# Altium PCB DCBus_PCB_v1.0.PcbDoc
Units mm, origin at the board's own origin, x right, y up, seen from the top; angles counter-clockwise.
Board outline 160 x 80 mm, 2 copper layers (Top Layer, Bottom Layer), stack 1.69 mm thick; 64 components, 32 nets, 154 pads, 48 vias.
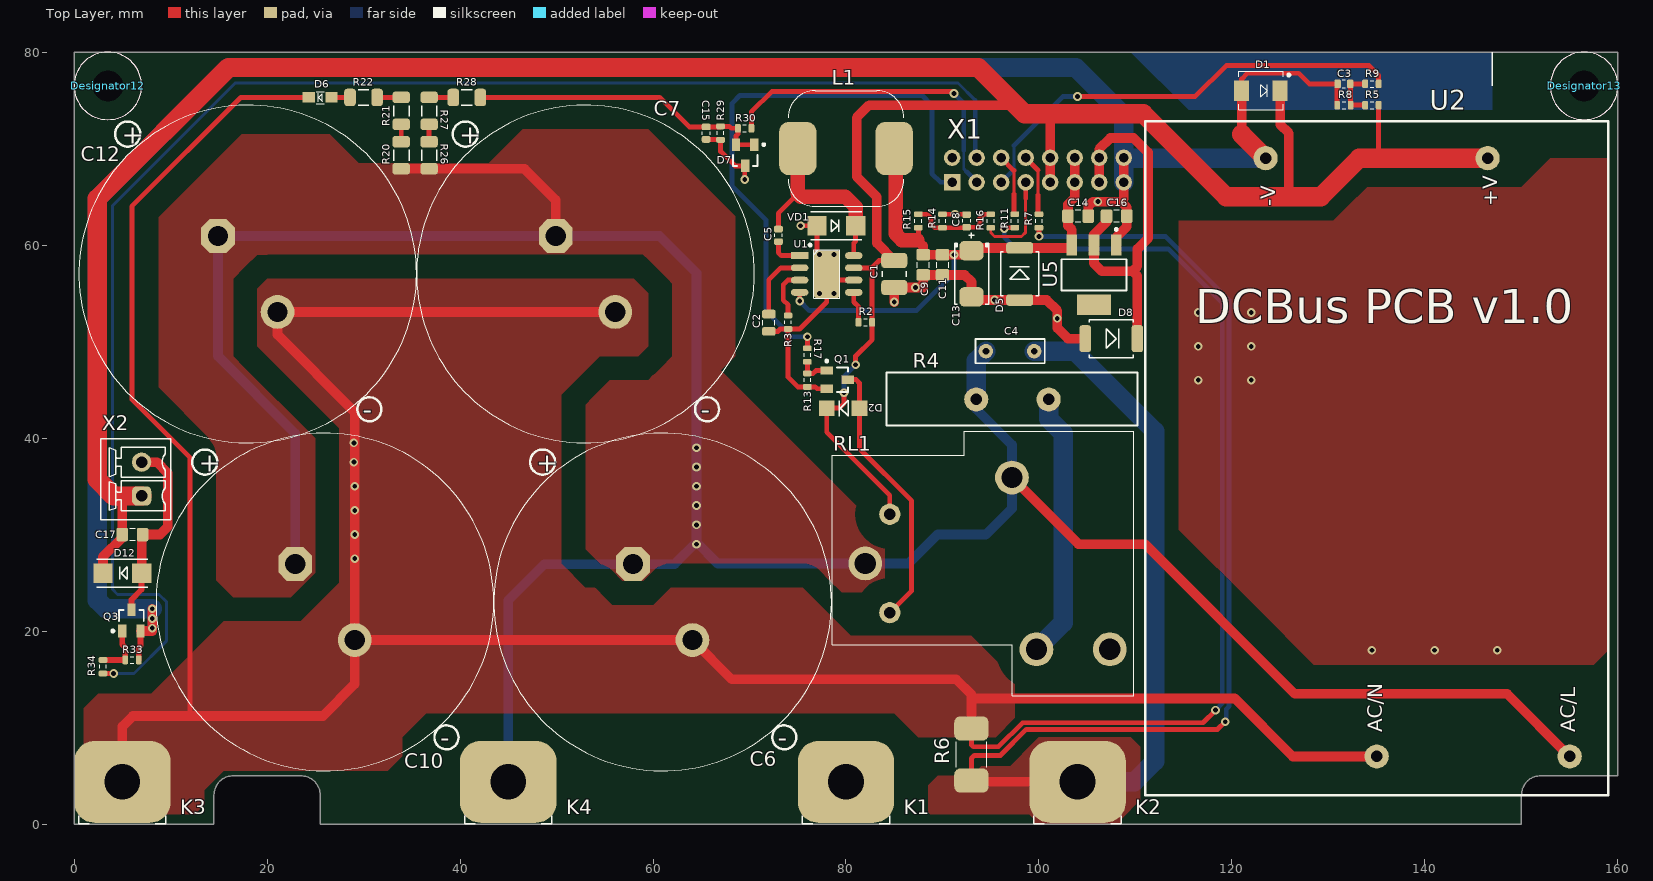
[diagram p0: Top Layer view]
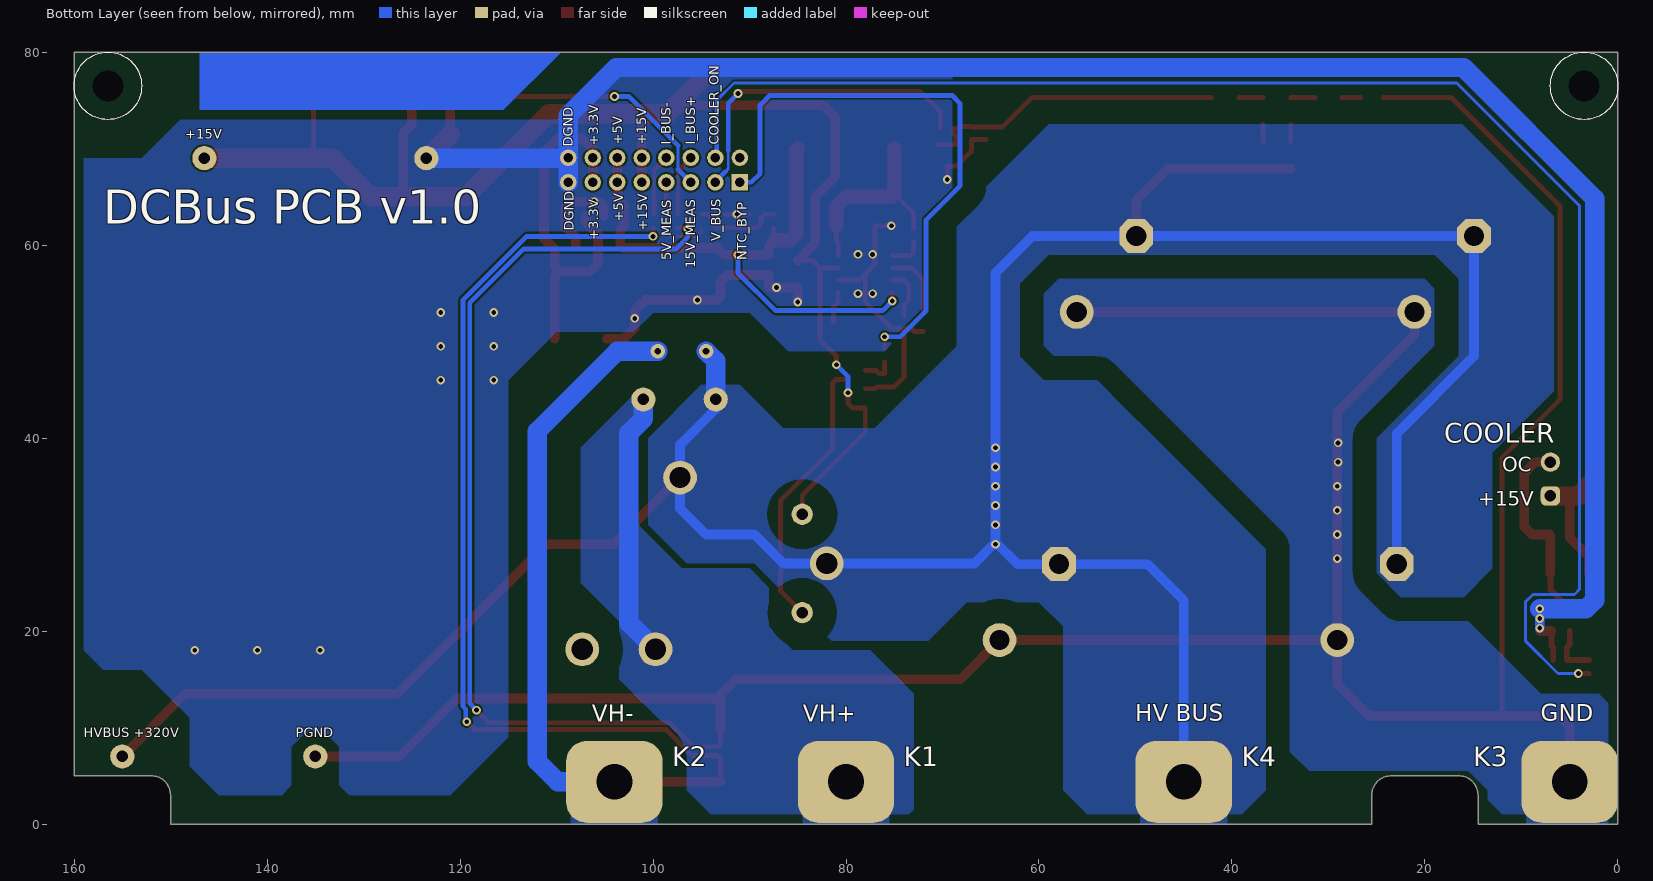
[diagram p1: Bottom Layer view, seen from below]
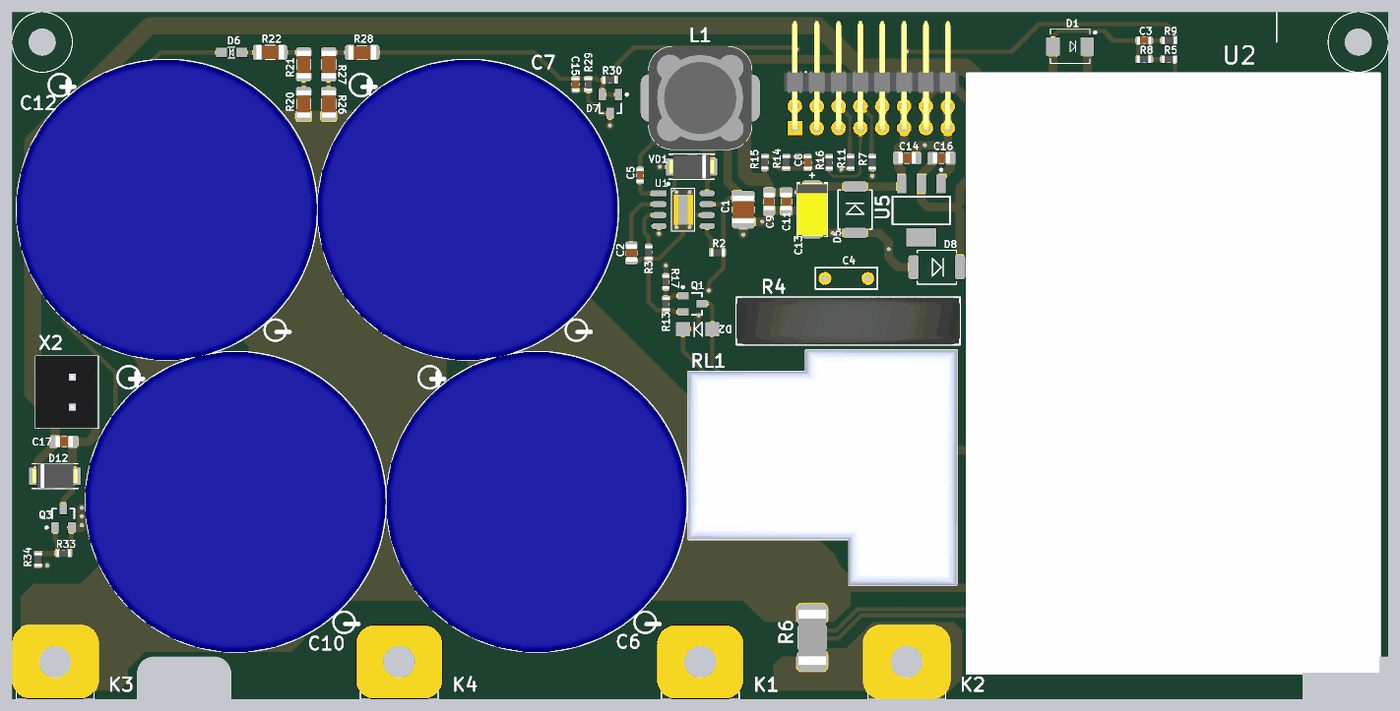
[diagram p2: 3D render of the assembled board from above, using the file's embedded part models]

## Layer stack, top to bottom
Top Solder: solder mask 0.0102, Solder Resist, Dk 3.5
Top Layer: signal copper 0.07
Dielectric1: core 1.55, FR-4, Dk 4.8
Bottom Layer: signal copper 0.07
Bottom Solder: solder mask 0.0102, Solder Resist, Dk 3.5

## Board outline
14.5,0 14.5,3 cw(c16.5,3) 16.5,5 23.5,5 cw(c23.5,3) 25.5,3 25.5,0 150,0 150,3 cw(c152,3) 152,5 160,5 160,80 0,80 0,0

## Design rules (kind name [scope] priority, off if disabled: settings)
Clearance MV [InNetClass('MV')] p1: gap=1 ignorepadtopadclearanceinfootprint=FALSE except(0: Arc-Hole Track-Hole SMDPad-Hole THPad-Hole Via-Hole Fill-Hole Poly-Hole Region-Hole Text-Hole)
Clearance HV_W [InNetClass('HV_W') vs InNetClass('HV_W')] p2: gap=0.2 ignorepadtopadclearanceinfootprint=FALSE except(0: Arc-Hole Track-Hole SMDPad-Hole THPad-Hole Via-Hole Fill-Hole Poly-Hole Region-Hole Text-Hole)
Clearance HV_V [InNetClass('HV_V') vs InNetClass('HV_V')] p3: gap=0.2 ignorepadtopadclearanceinfootprint=FALSE except(0: Arc-Hole Track-Hole SMDPad-Hole THPad-Hole Via-Hole Fill-Hole Poly-Hole Region-Hole Text-Hole)
Clearance HV_U [InNetClass('HV_U') vs InNetClass('HV_U')] p4: gap=0.2 ignorepadtopadclearanceinfootprint=FALSE except(0: Arc-Hole Track-Hole SMDPad-Hole THPad-Hole Via-Hole Fill-Hole Poly-Hole Region-Hole Text-Hole)
Clearance HV_B [InNetClass('HV_B') vs InNetClass('HV_B')] p5: gap=0.2 ignorepadtopadclearanceinfootprint=FALSE except(0: Arc-Hole Track-Hole SMDPad-Hole THPad-Hole Via-Hole Fill-Hole Poly-Hole Region-Hole Text-Hole)
Clearance HV_L [InNetClass('HV_L') vs InNetClass('HV_L')] p6: gap=0.2 ignorepadtopadclearanceinfootprint=FALSE except(0: Arc-Hole Track-Hole SMDPad-Hole THPad-Hole Via-Hole Fill-Hole Poly-Hole Region-Hole Text-Hole)
Clearance HV_N [InNetClass('HV_N') vs InNetClass('HV_N')] p7: gap=0.2 ignorepadtopadclearanceinfootprint=FALSE except(0: Arc-Hole Track-Hole SMDPad-Hole THPad-Hole Via-Hole Fill-Hole Poly-Hole Region-Hole Text-Hole)
Clearance OnMid_HV [OnMid vs InNetClass('HV_W') or InNetClass('HV_V') or InNetClass('HV_U') or InNetClass('HV_B') or InNetClass('HV_L') or InNetClass('HV_N')] p8: gap=1 ignorepadtopadclearanceinfootprint=FALSE except(0: Arc-Hole Track-Hole SMDPad-Hole THPad-Hole Via-Hole Fill-Hole Poly-Hole Region-Hole Text-Hole)
Clearance HV_OnMid [(InNetClass('HV_W') or InNetClass('HV_V') or InNetClass('HV_U') or InNetClass('HV_B') or InNetClass('HV_L') or InNetClass('HV_N')) and OnMid] p9: gap=1 ignorepadtopadclearanceinfootprint=FALSE except(0: Arc-Hole Track-Hole SMDPad-Hole THPad-Hole Via-Hole Fill-Hole Poly-Hole Region-Hole Text-Hole)
Clearance HV [(InNetClass('HV_W') or InNetClass('HV_V') or InNetClass('HV_U') or InNetClass('HV_B') or InNetClass('HV_L') or InNetClass('HV_N') )] p10: gap=2.5 ignorepadtopadclearanceinfootprint=FALSE except(0: Arc-Hole Track-Hole SMDPad-Hole THPad-Hole Via-Hole Fill-Hole Poly-Hole Region-Hole Text-Hole)
Clearance [All] p11: gap=0.2 ignorepadtopadclearanceinfootprint=FALSE except(0: Arc-Hole Track-Hole SMDPad-Hole THPad-Hole Via-Hole Fill-Hole Poly-Hole Region-Hole Text-Hole)
ComponentClearance [All] p1: gap=0 collisioncheckmode=3 verticalgap=0 showdistances=FALSE
Height [All] p1: minheight=0 maxheight=100 prefheight=12.7
HoleSize [All] p1: absolutevalues=TRUE maxlimit=8 minlimit=0.2 maxpercent=80.000 minpercent=20.000
HoleToHoleClearance [All] p1: gap=0.2 allowstackedmicrovias=TRUE
MinimumSolderMaskSliver [All] p1: minsoldermaskwidth=0
PolygonConnect [All] p1: connectstyle=Direct reliefconductorwidth=0.254 reliefentries=4 polygonreliefangle="90 Angle" airgapwidth=0.254
RoutingVias [All] p1: holewidth=0.5 width=0.9 viastyle="Through Hole" minholewidth=0.3 minwidth=0.6 maxholewidth=3 maxwidth=4
SilkToSilkClearance [All] p1: silktosilkclearance=0
SilkToSolderMaskClearance [IsPad] p1: minsilkscreentomaskgap=0 clearancetoexposedcopper=TRUE
SolderMaskExpansion [All] p1: expansion=0.102 istentingtop=FALSE
Width [All] p1: maxlimit=10 minlimit=0.2 preferedwidth=0.3
23 further rules are at their usual default settings.

## Classes and differential pairs
net class HV_B: HVBUS NetK1_1
net class MV: NetR20_2 NetR26_2

## Components (designator, comment, footprint, x,y, rotation, side; value= is the part's Value field where it differs from the comment)
C1 "GRM32DF51H106ZA01L" 3225[1210] 85,57 r270 top
C2 "GRM21BR71A105KA01L" 2012[0805] 72,52 r90 top
C3 "CL10B102KB8NNNC" 1608[0603] 131.6,76.7 r0 top
C4 "B32529C8102J" B32529C8102J 97,49 r0 top
C5 "CL10B103JB8NNNC" 1608[0603] 73,61 r270 top
C6 "ESMH451VNN471MA50T" ESMH451VNN471MA50T 61,23 r0 top locked
C7 "ESMH451VNN471MA50T" ESMH451VNN471MA50T 53,57 r0 top locked
C8 "CL10B102KB8NNNC" 1608[0603] 92.5,62.5 r270 top
C9 "LMK212F106ZG-T" 0805-1206 88,58 r90 top
C10 "ESMH451VNN471MA50T" ESMH451VNN471MA50T 26,23 r0 top locked
C11 "LMK212F106ZG-T" 0805-1206 90,58 r90 top
C12 "ESMH451VNN471MA50T" ESMH451VNN471MA50T 18,57 r0 top locked
C13 "TPSD227M010R0150" "Tant case C (6032-28)" 93,57 r270 top
C14 "LMK212F106ZG-T" 0805-1206 104,63 r180 top
C15 "CL10B102KB8NNNC" 1608[0603] 65.5,71.6 r270 top
C16 "LMK212F106ZG-T" 0805-1206 108,63 r180 top
C17 "LMK212F106ZG-T" 0805-1206 6,30 r180 top
D1 "SMBJ15A" "SMB ST" 123,76 r0 top
D2 "1N4148-0805" DIODE1206_LL4148 79.7,43.1 r90 top
D5 "SMAJ5.0A-LF" DO-214AA_SMBJ 98,57 r270 top
D6 "SML-211UTT86" "0805 LED" 25.5,75.3 r180 top
D7 "ESDA6V1L" SOT23 70.5,70.4 r180 top
D8 "SMAJ5.0A-LF" DO-214AA_SMBJ 107.5,50.3 r180 top
D12 "15MQ040NTRPBF" SMA 5,26 r180 top
Designator12 "Comment" HOLE_3MM 3.5,76.5 r0 top
Designator13 "Comment" HOLE_3MM 156.5,76.5 r0 top
K1 "Screw terminal KEYS7692 front" KEY7692_front 80,4.369 r0 top locked net-tie
K2 "Screw terminal KEYS7692 front" KEY7692_front 104,4.369 r0 top locked net-tie
K3 "Screw terminal KEYS7692 front" KEY7692_front 5,4.369 r0 top locked net-tie
K4 "Screw terminal KEYS7692 front" KEY7692_front 45,4.369 r0 top locked net-tie
L1 "DR127-101-R" DR127 80,70 r0 top
Q1 "BC817-40" SOT23 78,47 r270 top
Q3 "IRLML6344TRPBF" SOT23 5,20 r0 top
R2 "RC0603FR-07220KL" 0603 82,52 r0 top
R3 "RC0603FR-0747KL" 0603 74,52 r90 top
R4 "B57464S100M000" B57464 101,44 r180 top
R5 "RC0603FR-0733KL" 0603 134.5,74.5 r180 top
R6 "MCS3264R005FER" MCS3264 93,4.5 r90 top
R7 "ERJ-3EKF1000V" 0603 100,62.5 r270 top
R8 "RJ0603FRE074K7L" 0603 131.6,74.5 r180 top
R9 "ERJ-3EKF1000V" 0603 134.5,76.7 r0 top
R11 "ERJ-3EKF1000V" 0603 97.5,62.5 r270 top
R13 "ERJ-3EKF1002V" 0603 76,46 r90 top
R14 "RJ0603FRE074K7L" 0603 90,62.5 r90 top
R15 "RJ0603FRE074K7L" 0603 87.5,62.5 r90 top
R16 "ERJ-3EKF1000V" 0603 95,62.5 r270 top
R17 "RC0603FR-071KL" 0603 76,48.6 r270 top
R20 "ERJ-8ENF1003V" 3216[1206] 33.9,69.3 r90 top
R21 "ERJ-8ENF1003V" 3216[1206] 33.9,73.9 r90 top
R22 "ERJ-8ENF1003V" 3216[1206] 30,75.3 r180 top
R26 "ERJ-8ENF1003V" 3216[1206] 36.8,69.3 r90 top
R27 "ERJ-8ENF1003V" 3216[1206] 36.8,73.9 r90 top
R28 "ERJ-8ENF1003V" 3216[1206] 40.7,75.3 r0 top
R29 "RC0603FR-072K2L" 0603 67,71.6 r270 top
R30 "RC0603FR-07330RL" 0603 69.5,72.1 r180 top
R33 "RJ0603FRE074K7L" 0603 6,17 r180 top
R34 "ERJ-3EKF1000V" 0603 3,16.3 r270 top
RL1 "T9AS1D12-12" T90 82,27 r90 top
U1 "LM22672" "SOIC-8 EDP" 78,57 r0 top
U2 "NFM-15-15" NFM-15 155,7 r90 top locked
U5 "LD1117S33CTR" SOT-223 108,60 r180 top
VD1 "15MQ040NTRPBF" SMA 79,62 r0 top
X1 "68021-116HLF" 68021-116HLF 91,66.5 r0 top locked
X2 "MCV1.5/2-G-3.5" mcv1.5-2-g_3.5 7,34 r0 top

## Footprints (in the part's own frame and the unit in brackets; to place one, negate y for a bottom-side part, rotate by r counter-clockwise, add the part's x,y. Pads: shape width x height; smd on the part's side, far side on the other; paste and mask are expansions set on the pad)
0603 [mm] "Chip Resistor; Body 1.6 x 0.8 mm (LxW typ)"
  rrect50% 0.6x0.9 smd mask+0.06: 1(-0.7,0) 2(0.7,0)
  silkscreen extent -0.18,-0.35 0.18,0.35, body extent -0.79,-0.4 0.81,0.4, height 0.45
"0805 LED" [mm] "0805 LED"
  rect 1.25x1.1 smd: 1(-1.175,0) 2(1.175,0)
  silkscreen extent -0.41,-0.61 0.41,0.64, body extent -1.3,-0.6 1.3,0.6, height 1
0805-1206 [mm] "Chip Capacitor; Body 2.0 x 1.2 mm (LxW typ)"
  rrect30% 1.2x1.4 smd mask+0.05: 1(-1.1,0) 2(1,0)
  silkscreen extent -0.33,-0.64 0.23,0.61, body extent -1.05,-0.64 0.95,0.62, height 1.25
1608[0603] [mm] "Chip Capacitor; Body 1.6 x 0.8 mm (LxW typ)"
  rrect50% 0.7x0.9 smd mask+0.05: 1(-0.65,0) 2(0.65,0)
  silkscreen extent -0.15,-0.41 0.15,0.41, body extent -0.79,-0.41 0.81,0.39, height 0.8
2012[0805] [mm] "Chip Capacitor; Body 2.0 x 1.2 mm (LxW typ)"
  rrect50% 0.9x1.4 smd mask+0.07: 1(-0.95,0) 2(0.85,0)
  silkscreen extent -0.33,-0.64 0.23,0.61, body extent -1.05,-0.64 0.95,0.62, height 1.25
3216[1206] [mm] "Chip Capacitor; Body 3.2 x 1.6 mm (LxW typ)"
  rrect50% 1.2x1.8 smd: 1(-1.4,0) 2(1.4,0)
  silkscreen extent -0.56,-0.81 0.56,0.79, body extent -1.6,-0.81 1.6,0.79, height 1.15
3225[1210] [mm] "Chip Capacitor; Body 3.2 x 2.5 mm (LxW typ)"
  rrect50% 1.6x2.7 smd: 1(-1.4,0) 2(1.4,0)
  silkscreen extent -0.3,-1.25 0.3,1.25, body extent -1.6,-1.25 1.6,1.25, height 1.15
68021-116HLF [mm]
  rect 1.7x1.7 hole 1: 1(0,0)
  round 1.7 hole 1: 2(0,2.54) 3(2.54,0) 4(2.54,2.54) 5(5.08,0) 6(5.08,2.54) 7(7.62,0) 8(7.62,2.54) 9(10.16,0) 10(10.16,2.54) 11(12.7,0) 12(12.7,2.54) 13(15.24,0) 14(15.24,2.54) 15(17.78,0) 16(17.78,2.54)
  body extent -1.27,-0.3 19.05,12.46, height 4.83
B32529C8102J [mm]
  round 1.5 hole 0.7: 1(-2.5,0) 2(2.5,0)
  silkscreen extent -3.6,-1.25 3.6,1.25, body extent -3.7,-1.35 3.7,1.35, height 6.5
B57464 [mm]
  round 2.5 hole 1.2: 1(0,0) 2(7.5,0)
  silkscreen extent -9.2,-2.8 16.8,2.7, body extent -9.2,-2.8 16.8,2.7, height 28
DIODE1206_LL4148 [mil]
  rect 64x64 smd: 1(0,67) 2(0,-67)
  silkscreen extent -33,-21 31,15, body extent -31,-89 31,89, height 63
DO-214AA_SMBJ [mm]
  rrect50% 1.2x2.794 smd: 1(-2.7,0) 2(2.7,0)
  silkscreen extent -2.28,-1.97 2.28,1.97, body extent -2.29,-2.03 2.29,2.03, height 2
DR127 [mm] "DR127"
  rrect50% 3.85x5.5 smd: 1(-5,0) 2(5,0)
  silkscreen extent -6,-6 6,6, body extent -6,-6 6,6, height 7.7
ESMH451VNN471MA50T [mm]
  oct 3.5x3.5 hole 2.1: 1(-3.085,3.935)
  round 3.5 hole 2.1: 2(3.085,-3.935)
  silkscreen extent -17.5,-17.5 17.5,17.5, body extent -21.47,-21.42 21.37,21.38, height 50.02
HOLE_3MM [mm]
  round 3 hole 3.2 unplated: 0(0,0)
  Keep-Out Layer circle w0.1: c0,0 r3.5
  silkscreen extent -3.5,-3.5 3.5,3.5
KEY7692_front [mm]
  rrect50% 10x8.5 hole 3.7: 1(0,0)
  silkscreen extent -4.52,-4.37 4.52,-3.52
MCS3264 [mm] "Metal Element Current Sense"
  rrect50% 2.5x3.57 smd: 1(0,0) 2(5.4,0)
  silkscreen extent 1.4,-1.6 4,1.6, body extent -0.48,-1.6 5.92,1.6, height 0.61
mcv1.5-2-g_3.5 [mm] "mcv1.5-2-g_3.5"
  rrect50% 2x2 hole 1.2 mask+0.05: 1(0,0)
  round 2 hole 1.2 mask+0.05: 2(0,3.5)
  silkscreen extent -4.25,-2.45 3,5.95, body extent -4.27,-2.45 2.98,5.95, height 9.2
NFM-15 [mm]
  round 2.5 hole 1.2: +V(62,8.5) -V(62,31.51) AC/L(0,0) AC/N(0,20)
  silkscreen extent -4,-4 65.85,44, body extent -3.93,-4 65.92,44, height 22
SMA [mm]
  rect 2x2 smd: A(-2,0) K(2,0)
  silkscreen extent -2.65,-1.45 2.65,1.45, body extent -2.65,-1.45 2.65,1.45, height 2.55
"SMB ST" [mm] "Molded Diode, 2-Leads, Body 4.3x3.6mm, IPC Medium Density"
  rect 1.55x2.15 smd: 1(-2,0) 2(2,0)
  silkscreen extent -2.3,-2 3.03,2, body extent -2.3,-1.97 2.3,1.97, height 2.45
"SOIC-8 EDP" [mm] "SOIC-8 EDP Semtech"
  rect 1.8x0.7 smd: 1(-2.8,1.905)
  oval 1.8x0.7 smd: 2(-2.8,0.635) 3(-2.8,-0.635) 4(-2.8,-1.905) 5(2.8,-1.905) 6(2.8,-0.635) 7(2.8,0.635) 8(2.8,1.905)
  rrect20% 2.6x5 smd paste-0.75 mask+0.102: 9(0,0)
  silkscreen extent -1.85,-2.5 1.35,3.12, body extent -2,-2.5 2,2.5, height 1
SOT23 [mm] "SOT-23; 3 Leads; Body 3.0 x 2.6 mm, inc. leads (LxW max)"
  rect 0.85x1.3 smd: 1(0,0) 2(1.9,0) 3(0.95,2.2)
  silkscreen extent -1.1,-0.12 2.23,2.2, body extent -0.3,1 2.2,2.2, height 1
SOT-223 [mm]
  rect 1.1x2.15 smd: 1(0,0) 2(2.3,0) 3(4.6,0)
  rect 3.5x2.15 smd: 4(2.3,6.2)
  silkscreen extent -1.05,-1.75 5.65,4.72, body extent -1.1,1.4 5.7,4.7, height 1
T90 [mm]
  round 2.2 hole 1.2: 1(-5.1,-2.54) 2(5.1,-2.54)
  round 3.5 hole 2.2: 3(-8.9,-25.34) 4(-8.9,-17.74) 5(0,0) 5(8.9,-15.2)
  silkscreen extent -13.7,-27.84 13.7,3.4, body extent -13.7,-27.82 13.7,3.42, height 19.42
"Tant case C (6032-28)" [mm] "6mm * 3.2mm"
  rrect50% 2x2.5 smd: 1(-2.413,0) 2(2.362,0)
  silkscreen extent -4.3,-1.73 3.12,1.78, body extent -3.18,-1.73 3.12,1.77, height 2.91

## Part data
C1: "10uF, 50V, 20%, Y5V (F), 1210"
C2: "1 uF, 10V, 10%, X7R, 0805"
C3 C8 C15: library part CVNF1.0K0603_1, "1 nF, 50V, 10%, X7R, 0603 SMD MLC Capacitor"
C4: "CAP FILM 1000PF 630VDC 400VAC RADIAL Lead Spacing 5mm"
C5: library part CVNF010K0603, "10 nF, 50V, 5%, X7R, 0603 SMD MLC Capacitor"
C6 C7 C10 C12: "470uF 450V, 20%, -40..+85, 2000 Hrs @ 85°C, 35*50"
C9 C11 C14 C16 C17: "CAP CER 10UF 10V 10% X5R 0805"
C13: library part T520C157M010ATE055, "220.0 uF, 10V 20%, -55...105 C, SMD Tantalum"
D1: "DIODE TVS 15V 600W UNI 5% SMD"
D2: library part "Diode 100V 0805 1N4148", "Switching diode; 500mA; 4ns; 0805, 100V, 300mA"
D5 D8: "TVS 400W 5.0V Unidirect"
D6: "0805 red LED, hibright, 2 mA, 1.8V, 130°"
D7: "Dual transil array for ESD, 6.1 V, 300 W"
D12 VD1: library part 15MQ040N, "Schottky Power Rectifier 3A, 40V, SMA"
L1: "100 uH, 1.96A, ±20%, 163 mOhm"
Q1: "NPN 45V 0,5A 0,25W B:250-600 SOT23"
Q3: "N-channel MOSFET, 30V, 5A, 0.030 Ohm 3.3 V, SOT-23"
R2: library part RL0603K220-1_1, "220 K, 1%, 0603, SMD Resistor, Taped"
R3: "47 K, 1%, 0603, SMD Resistor, Taped"
R4: "CURRENT LIMITER INRSH 10 OHM 20%, 8A, Lead Spacing 7.5mm"
R5: library part RL0603K033-1_1, "33 K, 1%, 0603, SMD Resistor, Taped"
R6: "Curr.sens.res. 0.005 OHM 2W 1% , 2512 (6432 Metric)"
R7 R9 R11 R16 R34: library part RL0603E100-1_1, "100 R, 1%, 0603, SMD Resistor, Taped"
R8 R14 R15 R33: library part RL0603K004.7-1_1, "4.7 K, 1%, 0603, SMD Resistor, Taped"
R13: library part RL0603K010-1, "10 K, 1%, 0603, SMD Resistor, Taped"
R17: library part RL0603K001-1_1, "1 K, 1%, 0603, SMD Resistor, Taped"
R20 R21 R22 R26 R27 R28: library part RL1206K100-1, "100K, 1%,  1206,  200v,  SMD 1206"
R29: library part RL0603K002.2-1_1, "2.2 K, 1%, 0603, SMD Resistor, Taped"
R30: library part RL0603E330-1_1, "330 R, 1%, 0603, SMD Resistor, Taped"
RL1: library part "Relay T9AS1D12-12", "Relay, SPST-NO; PCB; 144R; 9-12VDC; 30A/250VAC"
U1: library part LM22672MRE-5.0, "SIMPLESWITCH, 1.0A 4.5~42VIN, 8PSOP"
U2: "AC/DC 15W, 15V, -20..+70 C"
U5: "Low drop positive voltage regulator, 3.3 V, 1A, SOT-223"
X1: "Headers & Wire Housings 16P SR UNSHRD HRD .76 GOLD OVER NI"
X2: "HEADER, VERTICAL, 3.5MM, 2WAY"

## Via types
v1: diameter 0.9, hole 0.5, Top Layer to Bottom Layer, tented both sides, 48 vias

## Nets (pads, with @x,y where several pads share a name; then routed paths per layer and width w, separated by ;. In a path a pad name is that pad's centre, name@x,y a point inside that pad or via, vN(x,y) a via of type N, cw(c..) or ccw(c..) an arc to the next point about the centre after c; other vN are vias at no path point)
5V_MEAS: R16.2 X1.7 | length 9.6
  Top Layer w0.3: R16.2 95,61.3 95.4,60.9 98.2,60.9 98.62,61.32 98.62,64.82
  Top Layer w0.5: 98.62,64.82 X1.7
15V_MEAS: R9.2 X1.5 | length 46.9
  Top Layer w0.5: v1(104,75.4) 116.2,75.4 119.4,78.6 134.2,78.6 135.2,77.6 R9.2
  Bottom Layer w0.3: 97.4,67.82 97.4,70.3
  Bottom Layer w0.5: X1.5 97.4,67.82 ; 97.4,70.3 102.5,75.4 v1(104,75.4)
COOLER_ON: R34.2 X1.4 | length 159.4
  Top Layer w0.5: R34.2 v1(4.1,15.6)
  Bottom Layer w0.3: v1(4.1,15.6) 6.2,15.6 9.6,19 9.6,23 8.8,23.8 4.5,23.8 4,24.3 4,64.1 16.7,76.8 91.6,76.8 93.4,75
  Bottom Layer w0.5: 93.4,75 93.4,69.18 X1.4
DGND: C1.2 C2.1 C3.1 C8.1 C9.1 C11.1 C13.2 C14.1 C15.2 C16.1 D1.1 D5.2 D7.3 D8.2 Q1.2 Q3.2 R3.1 R8.2 R13.1 R14.2 R29.2 R33.1 U1.6 U1.9 U2.-V U5.1 VD1.A X1.15 X1.16 | length 295.5
  Top Layer w0.3: C3.1@130.9,76.65 C3.1
  Top Layer w0.5: C15.2 66.95,70.95 R29.2 67,69.7 68.5,68.2 D7.3 69.5,68.15 v1(69.5,66.8) ; C2.1 72.95,51.05 73.2,51.3 R3.1 ; v1(75.3,62) VD1.A 77,58 U1.9 ; Q1.2 77,45.1 76.8,45.3 R13.1 75,45.3 74,46.3 R3.1 ; U1.6 78.635,56.365 U1.9 ; R14.2 92.45,63.2 C8.1 ; D1.1 121,77.2 121.6,77.8 126.9,77.8 128,76.7 C3.1 ; R8.2 C3.1@130.9,76.65 ; R3.1 75.2,51.3 78,54.1 U1.9
  Top Layer w0.6: R33.1 6.7,18.3 6.9,18.5 Q3.2
  Top Layer w1: Q3.2 8.1,20 v1(8.1,22.3) ; v1(85,54.1) C1.2 88,55.6 C9.1 C11.1 92.3,56.9 93,56.2 C13.2 93.338,54.3 D5.2 100.8,54.3 101.9,53.2 101.9,51.4 103,50.3 D8.2 ; C14.1 105.1,64 105.6,64.5 108.5,64.5 ; U5.1 108,60.8 109.1,61.9 C16.1 109.1,63.9 108.5,64.5 ; X1.16 X1.15 108.78,64.78 108.5,64.5 ; 121,71.49 D1.1
  Top Layer w2: 121,71.49 U2.-V
  Bottom Layer w1: v1(8.1,20.3) v1(8.1,21.3) v1(8.1,22.3)
  Bottom Layer w2: v1(8.1,22.3) 3.3,22.3 2.4,23.2 2.4,64.8 16,78.4 103.8,78.4 108.78,73.42 X1.16 ; X1.15 X1.16 ; U2.-V 108.82,69 X1.16
  other v1: 134.5,18 141,18 147.5,18 116.5,46 122,46 116.5,49.5 122,49.5 101.9,52.4 116.5,53 122,53 95.4,54.3 77.238,54.968 78.762,54.968 87.2,55.6 77.238,59.032 78.762,59.032 91.3,63.2 106.1,64.5
HVBUS: C4.1 C6.1 C7.1 C10.1 C12.1 K4.1 R4.2 R20.1 R26.1 RL1.5 U2.AC/L | length 302.3
  Top Layer w1: R20.1 R26.1 46.7,67.9 49.915,64.685 C7.1 ; RL1.5@97.2,35.9 104.1,29 111,29 126.5,13.5 148.5,13.5 U2.AC/L
  Bottom Layer w1: C10.1 22.915,40.485 14.915,48.485 C12.1 C7.1 60.665,60.935 64.5,57.1 v1@64.5,29.2 ; K4.1 45,23.2 48.735,26.935 C6.1 62.235,26.935 v1@64.5,29.2 ; R4.2 93.5,43 97.2,39.3 97.2,35.9 97.2,32.7 94.5,30 89.5,30 86.5,27 82,27 66.7,27 v1@64.5,29.2
  Bottom Layer w2: R4.2 93.5,48 C4.1
  other v1: 64.5,29 64.5,31 64.5,33 64.5,35 64.5,37 64.5,39
I_BUS+: R11.1 X1.6 | length 6.4
  Top Layer w0.3: 97.4,65.3 97.4,67.72
  Top Layer w0.5: X1.6 97.4,67.72 ; 97.4,65.3 97.4,63.3 R11.1
I_BUS-: R7.1 X1.8 | length 6.4
  Top Layer w0.3: 99.9,65.2 99.9,67.76
  Top Layer w0.5: X1.8 99.9,67.76 ; 99.9,65.2 99.9,63.3 R7.1
NetC2_2: C2.2 U1.2 | length 7.3
  Top Layer w0.5: C2.2 72,56.4 73.235,57.635 U1.2
NetC3_2: C3.2 R5.2 R8.1 R9.1 | length 5.3
  Top Layer w0.3: C3.2 C3.2@132.3,76.65
  Top Layer w0.5: C3.2 R9.1 ; C3.2@132.3,76.65 R8.1 R5.2
NetC4_2: C4.2 K2.1 R6.1 R7.2 | length 167.4
  Top Layer w0.5: R6.1 93,6.8 93.3,7.1 96,7.1 98.7,9.8 118.5,9.8 v1(119.3,10.6) ; v1(100,60.9) R7.2
  Top Layer w1: R6.1 93.131,4.369 K2.1
  Bottom Layer w0.5: v1(100,60.9) 113.1,60.9 119.7,54.3 119.7,12.21 119.4,11.91 119.4,10.7 v1(119.3,10.6)
  Bottom Layer w2: C4.2 103.7,49 112,40.7 112,6.5 109.869,4.369 K2.1
NetC5_1: C5.1 L1.1 U1.8 VD1.K | length 20.9
  Top Layer w0.5: C5.1 73,63.3 75,65.3 ; U1.8 80.8,60.2 81,60.4 VD1.K
  Top Layer w1.5: L1.1 75,65.3 75.3,65 79.942,65 81,63.942 VD1.K
NetC5_2: C5.2 U1.1 | length 3.5
  Top Layer w0.5: C5.2 73,59.2 73.295,58.905 U1.1
NetC8_2: C8.2 R14.1 R15.2 R16.1 | length 9.4
  Top Layer w0.5: R15.2 88.4,63.2 88.8,62.8 88.8,62.2 89.2,61.8 R14.1 92.45,61.8 C8.2 93.55,61.85 93.9,62.2 93.9,62.8 94.3,63.2 R16.1
NetC15_1: C15.1 D7.1 D7.2 R28.2 R29.1 R30.2 | length 31.7
  Top Layer w0.5: R28.2 60.7,75.3 63.75,72.25 C15.1 66.95,72.25 R29.1 67.9,72.3 68.1,72.1 R30.2 68.8,71.5 68.6,71.3 D7.2 D7.1
NetC17_1: C17.1 D12.A Q3.3 X2.2 | length 20
  Top Layer w0.6: Q3.3 5.95,23.25 7,24.3 D12.A
  Top Layer w1: D12.A 7,29.9 C17.1 8.9,30 9.7,30.8 9.7,36.4 8.6,37.5 X2.2
NetD2_2: D2.2 Q1.3 RL1.1 | length 28.3
  Top Layer w0.5: Q1.3 81.05,46.05 81.402,45.698 D2.2 81.402,38.898 86.8,33.5 86.8,24.16 RL1.1
NetD6_1: D6.1 R22.2 | length 1.9
  Top Layer w0.5: D6.1 R22.2
NetK1_1: K1.1 R4.1 RL1.4 | length 27.7
  Bottom Layer w2: RL1.4 102.5,20.86 102.5,40.5 101,42 R4.1
NetQ1_1: Q1.1 R13.2 R17.2 | length 3.3
  Top Layer w0.5: R17.2 R13.2 76.6,46.7 76.9,47 Q1.1
NetQ3_1: Q3.1 R33.2 R34.1 | length 5.4
  Top Layer w0.6: R34.1 R33.2 5.3,18.3 5,18.6 Q3.1
NetR2_1: R2.1 U1.5 | length 3.3
  Top Layer w0.5: U1.5 80.8,54.1 81.3,53.6 R2.1
NetR3_2: R3.2 U1.3 | length 5.3
  Top Layer w0.5: R3.2 74,53.8 73.5,54.3 73.5,55.9 73.965,56.365 U1.3
NetR20_2: R20.2 R21.1 | length 1.8
  Top Layer w0.5: R20.2 R21.1
NetR21_2: R21.2 R22.1 | length 2.5
  Top Layer w0.5: R22.1 R21.2
NetR26_2: R26.2 R27.1 | length 1.8
  Top Layer w0.5: R26.2 R27.1
NetR27_2: R27.2 R28.1 | length 2.5
  Top Layer w0.5: R27.2 R28.1
NTC_BYPASS: R17.1 X1.1 | length 60.6
  Top Layer w0.5: R17.1 v1(76,50.5)
  Bottom Layer w0.5: v1(76,50.5) 74.4,50.5 71.7,53.2 71.7,62.6 68.2,66.1 68.2,74.7 69,75.5 87.9,75.5 88.9,74.5 88.9,67.4 89.8,66.5 X1.1
PGND: C6.2 C7.2 C10.2 C12.2 D6.2 K3.1 R6.2 R11.2 U2.AC/N | length 399.7
  Top Layer w0.5: 12,11.2 12,38 6,44 6,64 17.3,75.3 D6.2 ; R6.2 93,8.2 93.2,8 95.8,8 98.3,10.5 117,10.5 v1(118.3,11.8) ; v1(96.4,61.7) 96.5,61.8 R11.2
  Top Layer w1: K3.1 5,10.1 6.1,11.2 12,11.2 25.8,11.2 29.085,14.485 C10.2 ; C7.2 C12.2 21.085,50.715 29.085,42.715 C10.2 ; R6.2 93,13.4 91.4,15 68.15,15 C6.2 C10.2 ; 93,13 120.3,13 126.3,7 U2.AC/N
  Bottom Layer w0.5: v1(96.4,61.7) 96.4,60.8 97.6,59.6 113.4,59.6 119,54 119,12.5 v1(118.3,11.8)
  other v1: 29.085,27.5 29.085,30 29.085,32.5 29.085,35 29,37.5 29,39.5
V5V: C9.2 C11.2 C13.1 C14.2 D5.1 L1.2 R15.1 U1.4 U5.3 X1.11 X1.12 | length 60.7
  Top Layer w0.5: v1(75.2,54.2) U1.4 ; 87.4,60.5 87.5,60.6 R15.1
  Top Layer w1: 87.4,60.5 88,59.9 C9.2 C11.2 92.587,59 C13.1 93.287,59.7 D5.1 103.1,59.7 U5.3 103.4,61.6 103,62 C14.2 103,64.2 103.7,64.9 X1.11 X1.12
  Top Layer w1.5: L1.2 85.15,69.85 85.15,61.15 85.8,60.5 87.4,60.5
  Bottom Layer w0.5: v1(75.2,54.2) 76.2,53.2 87.3,53.2 91.2,57.1 v1(91.2,59)
V15V: C1.1 C17.2 D1.2 D2.1 D12.K R2.2 R5.1 RL1.2 U1.7 U2.+V X1.9 X1.10 X2.1 | length 293.3
  Top Layer w0.5: v1(79.8,44.7) 79.8,43.6 79.3,43.1 D2.1 77.998,40.602 84.54,34.06 RL1.2 ; U1.7 82.665,57.635 ; v1(81,47.6) 81,48.5 82.7,50.2 R2.2 82.7,57.6 82.665,57.635 ; C1.1 83.43,58.4 82.665,57.635 ; 135.2,69 R5.1
  Top Layer w1: D12.K 3,27.7 5,29.7 C17.2 5,33.1 4.1,34 ; C1.1 83.2,60.2 83.2,65 81.1,67.1 81.1,73.2 82.4,74.5 97.596,74.5 ; X1.9 X1.10 101.16,73.4 ; D1.2 125,72.5 125.9,71.6 125.9,65
  Top Layer w2: X2.1 4.1,34 2.4,35.7 2.4,64.8 16,78.4 93.7,78.4 98.5,73.6 110.8,73.6 119.4,65 125.9,65 129.2,65 133.2,69 135.2,69 U2.+V
  Bottom Layer w0.5: v1(79.8,44.7) 79.8,46.4 v1(81,47.6)
V_BUS: R30.1 X1.3 | length 33.8
  Top Layer w0.5: R30.1 70.2,73.8 72.3,75.9 91,75.9 v1(91.2,75.7)
  Bottom Layer w0.3: 92.2,69.8 92.2,67.9 92.5,67.6
  Bottom Layer w0.5: v1(91.2,75.7) 92.2,74.7 92.2,69.8 ; 92.5,67.6 93.54,66.56 X1.3
VDDC: C16.2 D8.1 U5.2 X1.13 X1.14 | length 39.5
  Top Layer w1: X1.13 X1.14 106.24,69.94 107.4,71.1 109.8,71.1 111.3,69.6 111.3,60.7 110.2,59.6 110.2,57.8 109.7,57.3 ; C16.2 107,62.4 105.7,61.1 U5.2 105.7,58.1 106.5,57.3 109.7,57.3 ; D8.1 110.2,56.8 109.7,57.3
pads on no net: Designator12.0 Designator13.0 RL1.3 U5.4 X1.2

## Polygon pours and split planes (outlines as drawn)
DGND on Bottom Layer "Bot DGND" (solid, remove dead copper, pour order 10): 69,79 69,65 72,62 72,53 76,49 86,49 90,53 100,53 102,51 110,51 115,46 115,9 121,3 131.5,3 132.5,4 132.5,8 134,9.5 136,9.5 137.5,8 137.5,4 138.5,3 145,3 148,6 148,11 153,16 157,16 159,18 159,69 153,69 149,73 109.5,73 103.5,79
NetC4_2 on Bottom Layer "Bot NetC4_2 2" (solid, remove dead copper, pour order 18): 99.5,1.5 108.5,1.5 108.5,0 99.5,0
PGND on Bottom Layer "Bot PGND1" (solid, remove dead copper, pour order 14): 1,12.5 2,13.5 8,13.5 16.5,22 23,22 26.5,25.5 26.5,40.5 18,49 18,55.5 20,57.5 58.5,57.5 60.5,55.5 60.5,49 59,47.5 53.5,47.5 35.5,29.5 35.5,9 32,5.5 15.5,5.5 13.5,3.5 13.5,2.5 12,1 9.5,1 9.5,0 1,0
HVBUS on Bottom Layer "Bot HVBUS" (solid, remove dead copper, pour order 12): 100.5,40 100.5,31 96.5,27 89.5,27 81.5,19 71.5,19 67.5,23 60,23 57.5,20.5 57.5,3.5 55,1 49.5,1 49.5,0 40.5,0 40.5,1 39,1 36.5,3.5 36.5,28.5 51,43 54,46 59.5,46 62,48.5 62,56 59,59 19,59 16.5,56.5 16.5,48.5 25,40 25,26 22.5,23.5 16,23.5 13,26.5 13,38.5 6.5,45 6.5,64 15,72.5 59,72.5 68.5,63 68.5,49.5 77,41 86.5,41 91,45.5 95,45.5
NetK1_1 on Bottom Layer "Bot NetK1_1" (solid, remove dead copper, pour order 11): 94,1 97,4 97,8.5 103.5,15 103.5,21 107.5,25 107.5,39 102,44.5 102,31.5 97,26.5 90,26.5 88,24.5 88,20.5 85.5,18 77.5,18 73,13.5 73,1.5 73.5,1 75.5,1 75.5,0 84.5,0 84.5,1
PGND on Top Layer "Top PGND" (solid, remove dead copper, pour order 17): 95.5,9 97.5,11 97.5,15 93,19.5 80.5,19.5 75.5,24.5 53,24.5 50.5,27 50.5,44.5 54.5,48.5 58.5,48.5 59.5,49.5 59.5,55 58,56.5 20,56.5 19,55.5 19,49.5 27.5,41 27.5,25 23.5,21 15.5,21 8,13.5 2.5,13.5 1,12 1,1 12.5,1 13.5,2 13.5,3.5 15.5,5.5 32.5,5.5 34,7 34,9 36.5,11.5 85,11.5 87.5,9
NetC4_2 on Top Layer "Top NetC4_2" (solid, remove dead copper, pour order 15): 99.5,8.5 97,6 94,6 93,5 89.5,5 88.5,4 88.5,1 99,1 99.5,0.5 99.5,0 108.5,0 108.5,0.5 110.5,2.5 110.5,8 109.5,9 100,9
DGND on Top Layer "Top PGND" (solid, remove dead copper, pour order 16): 114.5,62.5 114.5,39.5 114.5,30.5 122.5,22.5 128.5,16.5 134.5,16.5 157.5,16.5 159,18 159,69 153,69 150,66 144,66 134,66 132,64 130.5,62.5 114.5,62.5
HVBUS on Top Layer "Top HVBUS" (solid, remove dead copper, pour order 13): 83.5,24 85,25.5 85,29 67,47 68.5,48.5 68.5,63 59.5,72 46.5,72 43,68.5 29.5,68.5 26.5,71.5 17,71.5 8.5,63 8.5,45.5 14,40 14,26 16.5,23.5 22.5,23.5 25,26 25,40 16.5,48.5 16.5,56.5 19,59 59,59 62,56 62,48.5 59.5,46 54,46 52.5,44.5 52.5,29 56.5,25 76.5,25 77.5,24

## Other copper
Bottom Layer:
  region: 109.5,80 147,80 147,74 115.5,74

## Silkscreen, mask and mechanical layers (free items; w line width, h text height)
Top Overlay:
  lines w0.15: 147,76.5 147,80
  text "DCBus PCB v1.0" at 116.2,50.7 h6
Bottom Overlay:
  text "+15V" at 148.5,71 h1
  text "COOLER_ON" at 93.2,70.4 h1 r270
  text "I_BUS+" at 95.6,70.4 h1 r270
  text "I_BUS-" at 98.162,70.413 h1 r270
  text "+15V" at 100.7,70.4 h1 r270
  text "+5V" at 103.2,70.4 h1 r270
  text "+3.3V" at 105.7,70.3 h1 r270
  text "DGND" at 108.3,70.2 h1 r270
  text "+5V" at 103.1,62.4 h1 r270
  text "+15V" at 100.6,61.5 h1 r270
  text "DGND" at 108.2,61.5 h1 r270
  text "DCBus PCB v1.0" at 157,61 h6
  text "+3.3V" at 105.7,60.5 h1 r270
  text "V_BUS" at 93,60.4 h1 r270
  text "NTC_BYP" at 90.3,58.4 h1 r270
  text "5V_MEAS" at 98.1,58.4 h1 r270
  text "15V_MEAS" at 95.6,57.6 h1 r270
  text "COOLER" at 18,39.5 h2
  text "OC" at 12,36.5 h1.5
  text "+15V" at 14.5,33 h1.5
  text "GND" at 8,10.035 h3
  text "HV BUS" at 50,10.035 h3
  text "+HV" at 79,10 h3
  text "-HV" at 102,10 h3
  text "PGND" at 137,9 h1
  text "HVBUS +320V" at 159,9 h1
  text "K3" at 15,6 h2
  text "K4" at 39,6 h2
  text "K1" at 74,6 h2
  text "K2" at 98,6 h2
Bottom Solder:
  rectangle: 0.5,0 9.5,2.5
  rectangle: 40.5,0 49.5,2.5
  rectangle: 75.5,0 84.5,2.5
  rectangle: 99.5,0 108.5,2.5
  region: 109,80 147.5,80 147.5,73.5 115.5,73.5
Mechanical 1:
  lines w0.1: 0,0 0,80 160,80 160,9 160,5 158.5,5 152,5 ccw(c152,3) 150,3 150,0 25.5,0 25.5,3 ccw(c23.5,3) 23.5,5 20,5 16.5,5 ccw(c16.5,3) 14.5,3 14.5,0 0,0

## Text inside footprints (layer, text, board x,y; h text height)
C6: Top Overlay "+" at 47.919,36.513 h2; Top Overlay "-" at 72.938,7.989 h2
C7: Top Overlay "+" at 39.919,70.513 h2; Top Overlay "-" at 64.938,41.989 h2
C10: Top Overlay "+" at 12.919,36.513 h2; Top Overlay "-" at 37.938,7.989 h2
C12: Top Overlay "+" at 4.919,70.513 h2; Top Overlay "-" at 29.938,41.989 h2
U2: Top Overlay "AC/L" at 155.594,9.515 h1.52 r90; Top Overlay "AC/N" at 135.594,9.515 h1.52 r90; Top Overlay "+V" at 147.51,64 h1.52 r90; Top Overlay "-V" at 124.5,64 h1.52 r90